# EAGLE board master_carconnector (EAGLE 6.1)
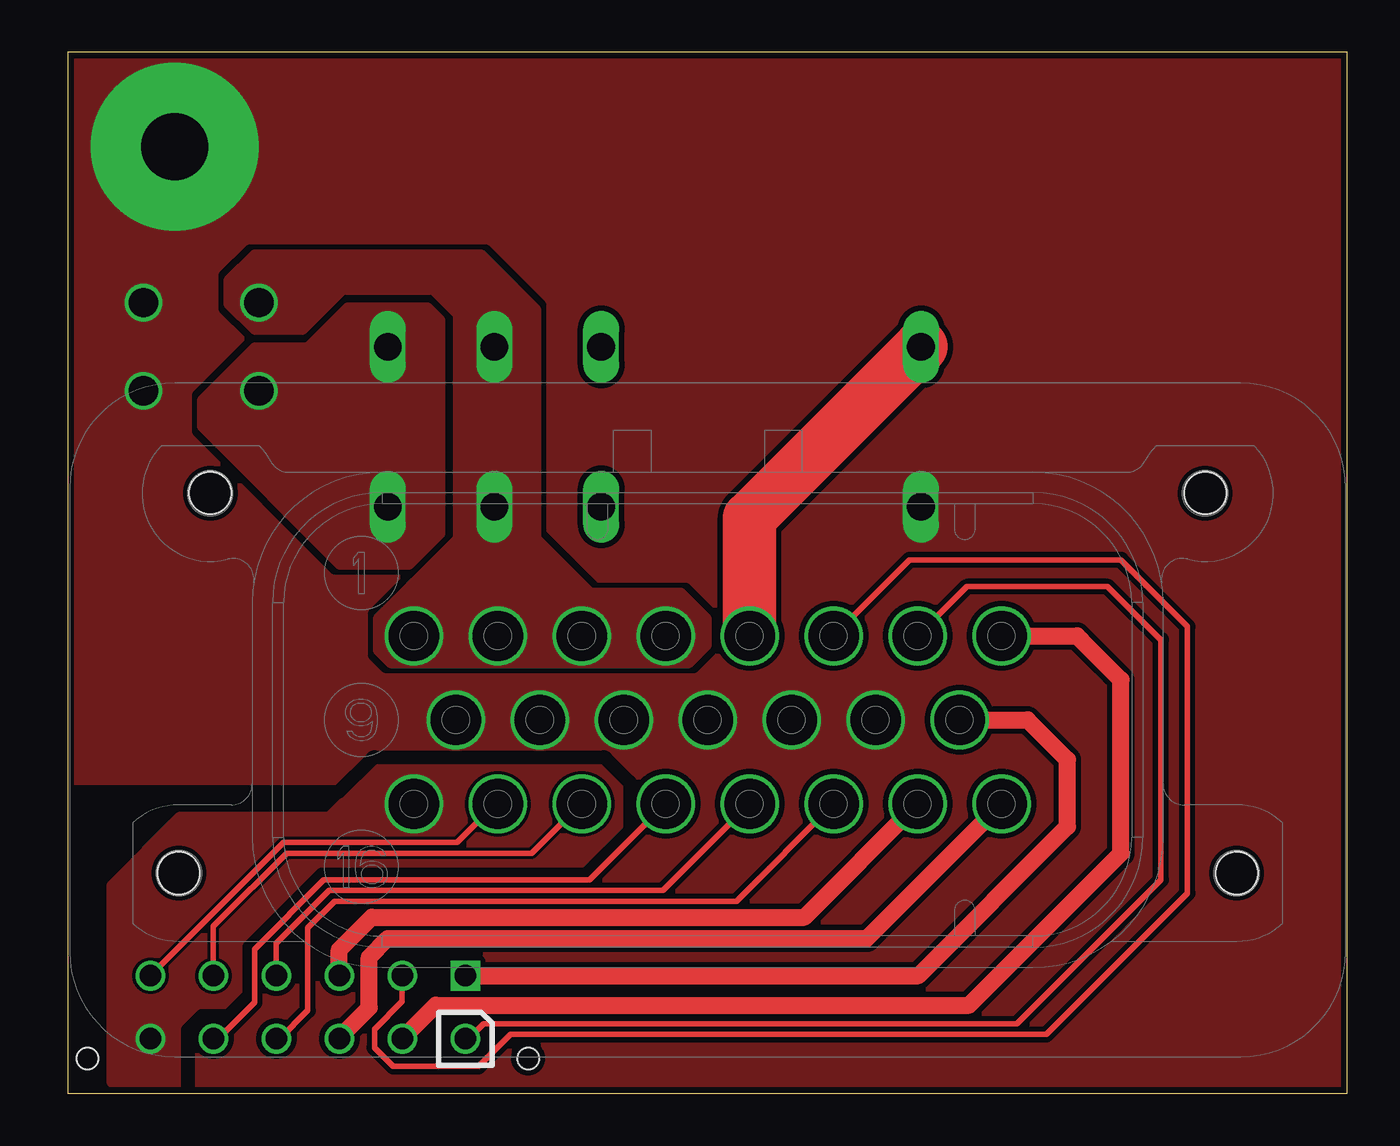
[diagram p0: board, top side]
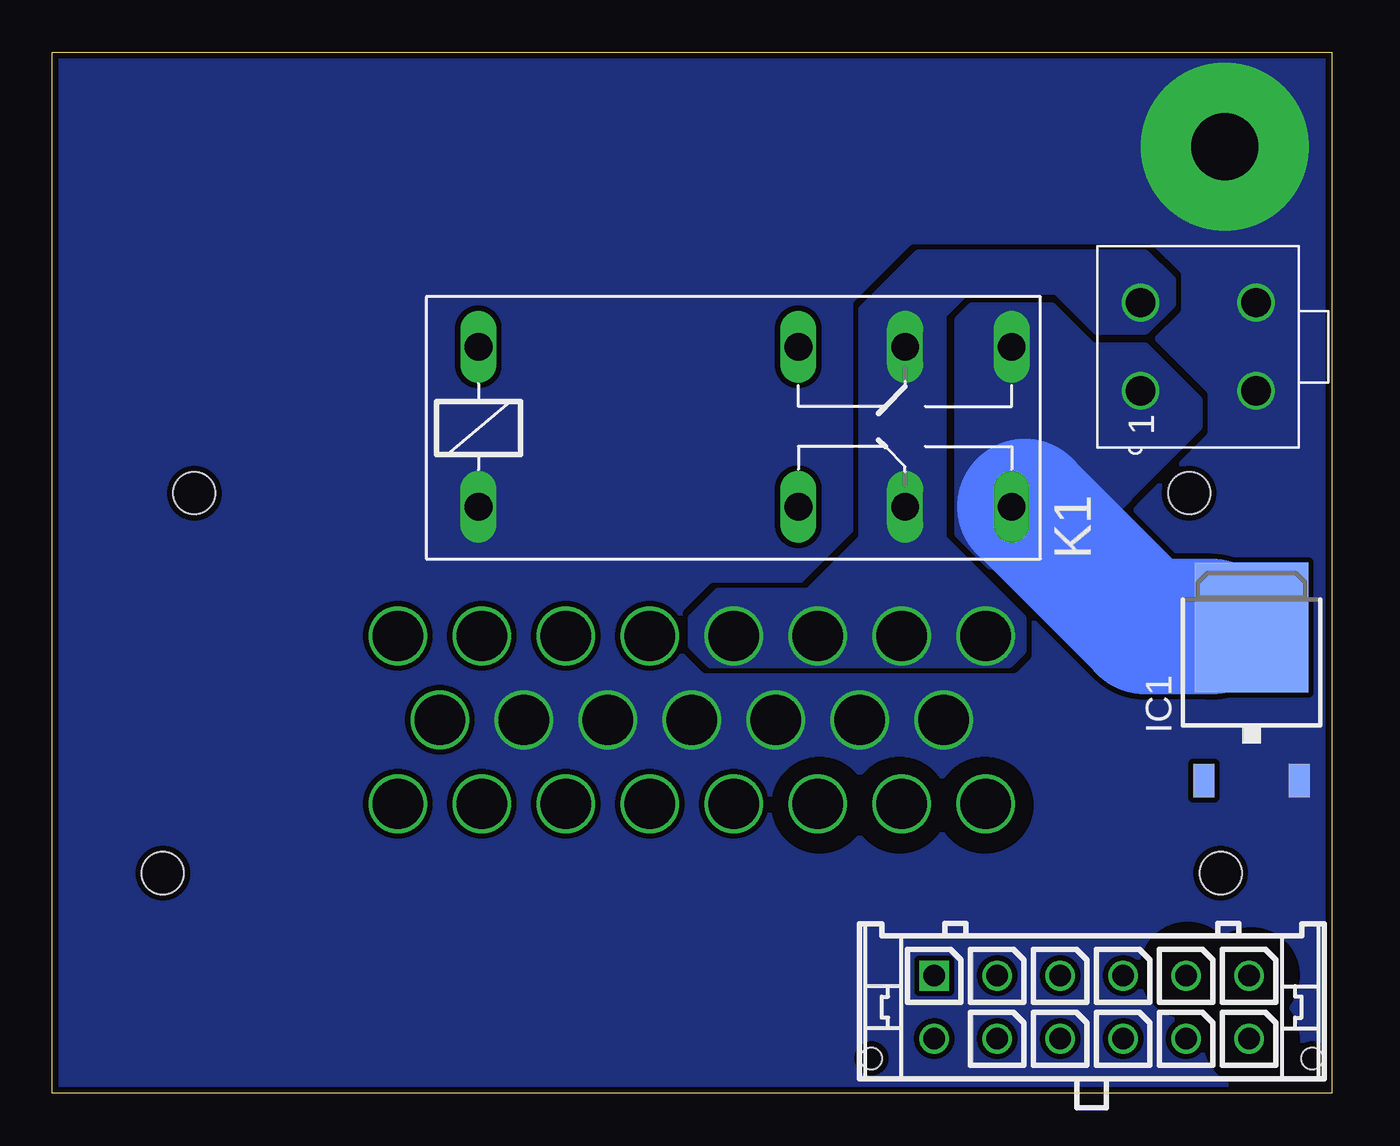
[diagram p1: board, bottom side, seen from below]

Size 60.94 x 49.58 mm. Coordinates in mm from the lower left corner, seen from the top.
Outline: 0,0 60.94,0 60.94,49.58 0,49.58 0,0
Copper layers (1*16): Top 0.035mm / dielectric 1.5mm / Bottom 0.035mm
Design rules: minimum track width 0.15mm, minimum drill 0.3mm, track to track 0.15mm, track to pad 0.15mm, pad to pad 0.15mm, via to via 0.15mm, smd to smd 0.15mm, copper to edge 0.3mm, drill to drill 0.2mm, minimum pad ring 0.2mm, minimum via ring 0.15mm, stop-mask expansion 0.075mm, vias tented up to drill 0mil, thermal gap 0.2mm
tRestrict: 15 lines
bRestrict: area 2,3.7 to 5.7,7.4; area 5,4 to 8.7,7.7; area 2,0.7 to 5.7,4.4; area 14.7,11.9 to 18.4,15.6; area 18.7,11.9 to 22.4,15.6; area 22.5,11.9 to 26.2,15.6

## Footprints (pad centres in the part's own frame; a part is rotated, then mirrored left to right if it is on the bottom)
TO252 = smd 1 x 1.6: 1 -2.28,-6.07; 2 2.28,-6.07 | smd 5.4 x 6.2: 3 0,1.23
F4052 = drill 1.321 long: 1 -3.81,3.81; 2 -3.81,-3.81; O1 11.43,-3.81; O2 11.43,3.81; P1 16.51,-3.81; P2 16.51,3.81; S1 21.59,-3.81; S2 21.59,3.81
5566-04 = drill 1.4: P1 -2.1,2.75; P2 2.1,2.75; P3 -2.1,-2.75; P4 2.1,-2.75
AMPSEAL23-STR = drill 2.4: P$1 -14,4; P$2 -10,4; P$3 -6,4; P$4 -2,4; P$5 2,4; P$6 6,4; P$7 10,4; P$8 14,4; P$9 -12,0; P$10 -8,0; P$11 -4,0; P$12 0,0; P$13 4,0; P$14 8,0; P$15 12,0; P$16 -14,-4; P$17 -10,-4; P$18 -6,-4; P$19 -2,-4; P$20 2,-4; P$21 6,-4; P$22 10,-4; P$23 14,-4 | hole 2: -23.7,10.8; 23.7,10.8; 25.2,-7.3; -25.2,-7.3
43045-1212 = drill 1.02 square: P$1 7.5,0 | drill 1.02: P$2 4.5,0; P$3 1.5,0; P$4 -1.5,0; P$5 -4.5,0; P$6 -7.5,0; P$7 7.5,3; P$8 4.5,3; P$9 1.5,3; P$10 -1.5,3; P$11 -4.5,3; P$12 -7.5,3 | hole 1.02: 10.5,3.94; -10.5,3.94

## Placement (x,y rotation side)
IC1  DIODE: 2075028  [TO252]  3.81,20.95 0 bottom
K1  4052  [F4052]  36.83,31.75 0 bottom
X2  MINI-FIT-JR-045566  [5566-04]  6.35,35.56 90 bottom
X3  AMPSEAL23STR  [AMPSEAL23-STR]  30.48,17.78 0 top
X10  [43045-1212]  11.43,5.59 180 bottom

## Library data of the parts
IC1 = v-reg-3
K1 = relay; OC_FARNELL: unknown; OC_NEWARK: unknown
X2 = con-molex-minifitjr
X3 = bms-hsrm
X10 = con-molex-micro-fit-3_0

## Nets
CANGND: X3.P$16 X10.P$12
CANH: X3.P$17 X10.P$6
CANL: X3.P$18 X10.P$5
CAR+12V: K1.P1 K1.P2 X2.P2 X3.P$1 X3.P$2 X3.P$3 X3.P$4
CARGND: IC1.2 K1.2 X2.P3 X2.P4 X3.P$9 X3.P$10 X3.P$11 X3.P$12 X3.P$13 X3.P$14
DCDCRELAI: X3.P$8 X10.P$8
DISCHARGE+: X3.P$22 X10.P$3
DISCHARGE-: X3.P$23 X10.P$9
EMERGENCYIN: X3.P$7 X10.P$7
EMERGENCYOUT: X3.P$6 X10.P$2
GPIO: X3.P$21 X10.P$10
RELAI+12V: IC1.3 K1.S1 K1.S2 X2.P1
RELAI+12VC: K1.1 X3.P$5
RX: X3.P$20 X10.P$4
TSAL: X3.P$15 X10.P$1
TX: X3.P$19 X10.P$11

## Tracks (layer width: path | path; a pad name or v marks a point on that pad's centre or on a via)
CANGND
  pour Top (no thermals): 14.99,15.75 25.4,15.75 26.42,14.73 26.42,12.45 24.64,10.67 12.19,10.67 8.51,6.99 8.51,4.95 7.62,4.06 6.1,4.06 5.33,3.3 5.33,0.51 4.57,-0.25 2.79,-0.25 2.03,0.51 2.03,9.91 5.33,13.21 12.45,13.21
CANH
  Top 0.254: 20.38,13.78 18.54,11.94 10.28,11.94 X10.P$6
  Top 0.406: X3.P$17 20.38,13.78
CANL
  Top 0.254: 24.45,13.78 22.86,12.19 22.61,11.94 22.1,11.43 18.03,11.43 10.41,11.43 7.11,8.13 6.93,7.95 X10.P$5
  Top 0.406: X3.P$18 24.45,13.78
CAR+12V
  pour Bottom (rank 2, no thermals): 22.35,26.42 22.35,37.34 19.68,40.01 8.89,40.01 7.62,38.73 7.62,37.59 8.89,36.32 11.18,36.32 13.08,38.23 17.4,38.23 18.54,37.08 18.54,26.42 14.73,22.61 14.73,21.08 15.37,20.45 29.59,20.45 30.48,21.34 30.48,22.61 29.21,23.88 24.89,23.88
  pour Top (rank 2, no thermals): 22.35,26.42 22.35,37.34 19.68,40.01 8.89,40.01 7.62,38.73 7.62,37.59 8.89,36.32 11.18,36.32 13.08,38.23 17.4,38.23 18.54,37.08 18.54,26.42 14.73,22.61 14.73,21.08 15.37,20.45 29.59,20.45 30.48,21.34 30.48,22.61 29.21,23.88 24.89,23.88
CARGND  (via drill 3.2 pad 8)
  other vias: 5.08,45.09
  pour Bottom (isolate 0.254, rank 6, no thermals): 0,0 60.96,0 60.96,49.53 0,49.53
  pour Top (isolate 0.254, rank 6, no thermals): 0,0 60.96,0 60.96,49.53 0,49.53
DCDCRELAI
  Top 0.813: X10.P$8 17.53,4.19 42.93,4.19 50.16,11.43 50.16,19.68 48.26,21.59 48.07,21.78 X3.P$8
DISCHARGE+
  Top 0.813: X10.P$3 12.93,6.83 14.48,8.38 35.08,8.38 X3.P$22
DISCHARGE-
  Top 0.813: X10.P$9 12.93,2.64 14.35,4.06 14.35,6.48 15.24,7.37 38.07,7.37 X3.P$23
EMERGENCYIN
  Top 0.254: X10.P$7 19.1,2.59 19.81,3.3 45.21,3.3 52.07,10.16 52.07,21.59 49.53,24.13 42.83,24.13 X3.P$7
EMERGENCYOUT
  Top 0.254: X10.P$2 15.93,4.37 14.61,3.05 14.61,2.16 15.49,1.27 19.56,1.27 21.08,2.79 46.61,2.79 53.34,9.53 53.34,22.23 50.16,25.4 40.1,25.4 X3.P$6
GPIO
  Top 0.254: X10.P$10 10.08,2.59 11.43,3.94 11.43,7.87 12.7,9.14 31.84,9.14 X3.P$21
RELAI+12V
  Bottom 0.254: K1.S1 14.61,27.94 | 14.61,27.94 13.97,27.94 14.61,27.94
  Bottom 1.422: IC1.3 5.67,22.18 5.71,22.23
  Bottom 6.452: 5.71,22.23 8.89,22.23 14.61,27.94
  pour Bottom (rank 2, no thermals): 6.35,33.02 8.89,35.56 11.43,35.56 13.34,37.47 17.14,37.47 17.78,36.83 17.78,26.67 16.26,25.15 12.95,25.15 6.35,31.75
  pour Top (rank 2, no thermals): 6.35,33.02 8.89,35.56 11.43,35.56 13.34,37.47 17.14,37.47 17.78,36.83 17.78,26.67 16.26,25.15 12.95,25.15 6.35,31.75
RELAI+12VC
  Top 2.54: X3.P$5 32.48,27.4 K1.1
RX
  Top 0.254: X10.P$4 9.93,7.14 12.45,9.65 28.35,9.65 X3.P$20
TSAL
  Top 0.813: X10.P$1 40.51,5.59 47.62,12.7 47.62,15.88 45.72,17.78 X3.P$15
TX
  Top 0.254: X10.P$11 7.16,2.59 8.89,4.32 8.89,6.86 12.19,10.16 24.86,10.16 X3.P$19